# EAGLE board MPU-6050-HMC-5883 (EAGLE 6.2)
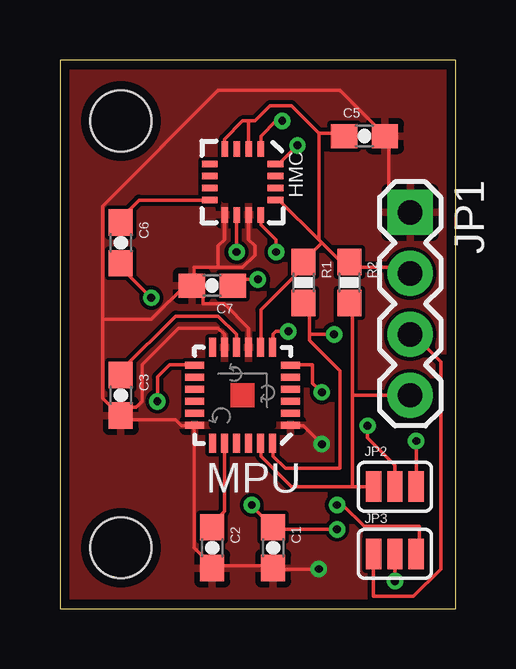
[diagram p0: board, top side]
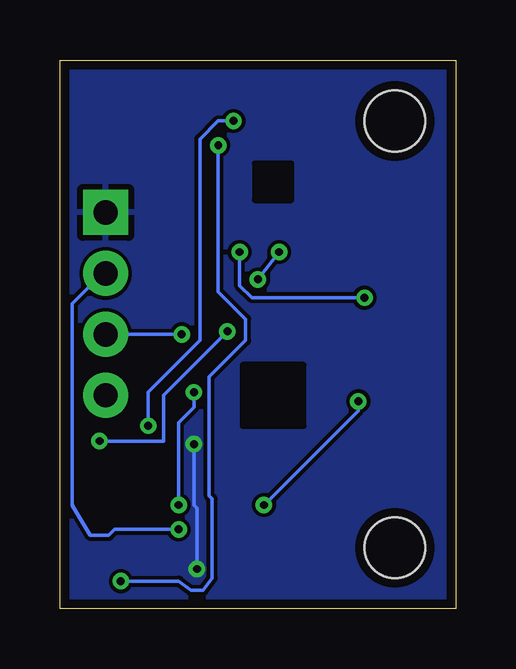
[diagram p1: board, bottom side, seen from below]

Size 16.51 x 22.86 mm. Coordinates in mm from the lower left corner, seen from the top.
Outline: 0,0 16.51,0 16.51,22.86 0,22.86 0,0
Copper layers (1*16): Top 0.0356mm / dielectric 1.5011mm / Bottom 0.0356mm
Design rules: minimum track width 6mil, minimum drill 13mil, track to track 6mil, track to pad 6mil, pad to pad 6mil, via to via 6mil, smd to smd 6mil, copper to edge 15mil, drill to drill 6mil, minimum pad ring 7mil, minimum via ring 7mil, stop-mask expansion 4mil, vias tented up to drill 0mil, thermal gap 10mil
Holes 2.54 mm at 2.54,20.32 2.54,2.54
tRestrict: area 6.9,17 to 8.4,18.5; area 6.3,7.6 to 8.9,10.2
bRestrict: area 6.9,17 to 8.4,18.5; area 6.3,7.6 to 8.9,10.2

## Footprints (pad centres in the part's own frame; a part is rotated, then mirrored left to right if it is on the bottom)
0603-CAP = smd 1.1 x 1: 1 -0.85,0; 2 0.85,0
16LPCC = smd 0.65 x 0.28: 1 -1.37,0.75; 2 -1.37,0.25; 3 -1.37,-0.25; 4 -1.37,-0.75; 9 1.37,-0.75; 10 1.37,-0.25; 11 1.37,0.25; 12 1.37,0.75 | smd 0.28 x 0.65: 5 -0.75,-1.37; 6 -0.25,-1.37; 7 0.25,-1.37; 8 0.75,-1.37; 13 0.75,1.37; 14 0.25,1.37; 15 -0.25,1.37; 16 -0.75,1.37
1X04 = drill 1.016 pad 1.88 square: 1 0,0 | drill 1.016 pad 1.88: 2 2.54,0; 3 5.08,0; 4 7.62,0
SJ_3 = smd 0.635 x 1.27: 1 -0.889,0; 2 0,0; 3 0.889,0
QFN-24 = smd 0.8 x 0.3: 1 -2,1.25; 2 -2,0.75; 3 -2,0.25; 4 -2,-0.25; 5 -2,-0.75; 6 -2,-1.25; 13 2,-1.25; 14 2,-0.75; 15 2,-0.25; 16 2,0.25; 17 2,0.75; 18 2,1.25 | smd 0.3 x 0.8: 7 -1.25,-2; 8 -0.75,-2; 9 -0.25,-2; 10 0.25,-2; 11 0.75,-2; 12 1.25,-2; 19 1.25,2; 20 0.75,2; 21 0.25,2; 22 -0.25,2; 23 -0.75,2; 24 -1.25,2
0603-RES = smd 1.1 x 1: 1 -0.85,0; 2 0.85,0

## Placement (x,y rotation side)
C1  [0603-CAP]  8.89,2.54 270 top
C2  [0603-CAP]  6.35,2.54 270 top
C3  [0603-CAP]  2.54,8.89 270 top
C5  [0603-CAP]  12.7,19.68 0 top
C6  [0603-CAP]  2.54,15.24 270 top
C7  [0603-CAP]  6.35,13.46 180 top
HMC  HMC5883LSMD  [16LPCC]  7.62,17.78 270 top
JP1  [1X04]  14.61,16.51 270 top
JP2  JUMPER-3SMD  [SJ_3]  13.97,5.08 0 top
JP3  JUMPER-3SMD  [SJ_3]  13.97,2.29 0 top
MPU  MPU-6050  [QFN-24]  7.62,8.89 180 top
R1  [0603-RES]  10.16,13.59 270 top
R2  [0603-RES]  12.06,13.59 270 top

## Library data of the parts
C1-C3 C5-C7 HMC JP1-JP3 R1 R2 = SparkFun
MPU = MPU-6050

## Nets
ACL: JP2.3 MPU.7
ADA: JP3.3 MPU.6
C1: C7.1 HMC.10
CPOUT: C2.1 MPU.20
GND: C1.2 C2.2 C3.2 C5.2 C7.2 HMC.9 HMC.11 JP1.1 MPU.1 MPU.9 MPU.11 MPU.18
REGOUT: C3.1 MPU.10
SCL: JP1.4 JP2.1 MPU.23 R2.2
SCLHMC: HMC.1 JP2.2
SDA: JP1.3 JP3.1 MPU.24 R1.2
SDAHMC: HMC.16 JP3.2
SETC: C6.2 HMC.12
SETP: C6.1 HMC.8
VCC: C1.1 C5.1 HMC.2 HMC.4 HMC.13 JP1.2 MPU.8 MPU.13 R1.1 R2.1

## Tracks (layer width: path | path; a pad name or v marks a point on that pad's centre or on a via)
ACL  (via drill 0.33)
  Top 0.152: v9.53,11.56 9.02,11.56 8.89,11.43 8.89,10.92 MPU.7 | JP2.3 v14.86,6.99
  Bottom 0.152: v14.86,6.99 12.19,6.99 12.19,8.89 v9.53,11.56
ADA  (via drill 0.33)
  Top 0.152: v10.92,9.02 10.54,9.4 10.54,10.16 9.4,10.16 MPU.6 | v11.56,4.32 11.81,4.32 12.7,3.43 14.99,3.43 14.99,2.54 JP3.3
  Bottom 0.152: v11.56,4.32 11.56,7.75 10.92,8.38 v10.92,9.02
C1  (via drill 0.33)
  Top 0.152: v7.37,14.86 7.37,16.51 HMC.10 | C7.1 7.49,13.72 v8.26,13.72
  Bottom 0.152: v8.26,13.72 v7.37,14.86
CPOUT
  Top 0.152: MPU.20 6.86,6.86 6.86,4.06 6.35,3.56 C2.1
GND  (via drill 0.33)
  Top 0.152: JP1.1 14.48,16.51 13.72,17.27 13.72,19.56 C5.2 13.46,19.81 11.68,21.59 6.6,21.59 1.78,16.76 1.78,12.06 | 6.6,14.22 6.6,15.11 6.86,15.37 6.86,16.26 HMC.9 | 5.59,13.97 5.59,14.22 6.6,14.22 | 6.6,14.22 7.62,14.22 8.13,14.73 8.13,15.11 7.87,15.37 7.87,16.26 HMC.11 | 7.87,11.68 7.87,10.92 MPU.9 7.87,11.68 | 5.59,13.97 5.97,13.59 | 5.59,13.97 C7.2 | 6.35,1.78 8.89,1.78 C1.2 8.93,1.65 v10.79,1.65 | 5.84,7.62 MPU.18 5.59,7.62 | MPU.1 9.4,7.62 10.16,7.62 v10.92,6.86 | 5.59,7.62 5.08,7.62 4.83,7.87 2.54,7.87 C3.2 2.92,8.38 | 6.35,1.78 5.59,2.54 5.59,7.62 | 6.35,1.78 C2.2 | 2.92,8.38 3.17,8.38 3.43,8.64 3.43,10.16 4.95,11.68 6.6,11.68 6.86,11.43 6.86,10.92 MPU.11 | 1.78,12.06 1.78,8.76 2.16,8.38 2.92,8.38 | 7.87,11.68 6.86,12.7 5.97,12.7 5.97,13.59 | 5.97,13.59 5.33,13.59 3.81,12.06 1.78,12.06
  Bottom 0.152: v10.92,6.86 10.92,4.32 10.79,4.19 v10.79,1.65
  pour Top: 0,22.86 16.51,22.86 16.51,0 0,0
  pour Bottom: 0,22.86 16.51,22.86 16.51,0 0,0
REGOUT
  Top 0.152: MPU.10 7.37,10.92 7.37,11.43 6.6,12.19 4.83,12.19 2.54,9.91 C3.1
SCL
  Top 0.152: JP2.1 12.19,5.08 | 12.19,5.08 9.65,5.08 8.38,6.35 8.38,6.86 MPU.23 | 12.19,5.08 12.19,8.89 | 12.19,8.89 12.19,12.7 R2.2 | 12.19,8.89 JP1.4
SCLHMC  (via drill 0.33)
  Top 0.152: v9.27,20.32 9.02,20.32 8.38,19.68 8.38,19.05 HMC.1 | v12.83,7.62 12.83,7.11 13.97,5.97 JP2.2
  Bottom 0.152: v9.27,20.32 9.91,20.32 10.67,19.56 10.67,11.18 12.83,9.02 v12.83,7.62
SDA  (via drill 0.33)
  Top 0.152: 10.41,11.43 10.41,12.45 10.16,12.7 R1.2 | 10.41,11.43 10.41,11.18 11.68,9.91 11.68,5.84 9.4,5.84 8.89,6.35 8.89,6.86 MPU.24 | JP3.1 13.08,0.51 14.73,0.51 15.88,1.65 15.88,10.29 14.73,11.43 JP1.3 | v11.43,11.43 10.41,11.43
  Bottom 0.152: JP1.3 v11.43,11.43
SDAHMC  (via drill 0.33)
  Top 0.152: v9.91,19.3 9.14,18.54 HMC.16 | JP3.2 v13.97,1.14
  Bottom 0.152: v9.91,19.3 9.91,13.21 8.76,12.06 8.76,11.18 10.29,9.65 10.29,4.7 10.16,4.57 10.16,1.27 10.54,0.76 11.05,0.76 11.56,1.14 v13.97,1.14
SETC  (via drill 0.33)
  Top 0.152: v9.02,14.86 9.02,15.37 8.38,16 8.38,16.26 HMC.12 | v3.81,12.95 2.54,14.22 C6.2
  Bottom 0.152: v9.02,14.86 9.02,13.46 8.51,12.95 v3.81,12.95
SETP
  Top 0.152: HMC.8 6.1,17.02 3.3,17.02 2.54,16.26 C6.1
VCC  (via drill 0.33)
  Top 0.152: 10.79,19.81 11.68,19.81 C5.1 | 10.79,19.81 9.65,20.95 8.76,20.95 8.13,20.32 7.87,20.32 | 7.87,20.32 7.62,20.32 6.86,19.56 6.86,19.3 HMC.4 | 7.87,20.32 7.87,19.3 HMC.2 | MPU.13 5.84,10.16 4.57,10.16 4.06,9.65 v4.06,8.64 | 8.38,10.67 MPU.8 8.38,10.92 8.38,12.45 10.16,14.22 R1.1 10.16,14.48 10.92,15.24 | 10.92,15.24 11.94,14.22 R2.1 12.19,14.22 14.22,14.22 14.48,13.97 JP1.2 | 10.92,15.24 10.79,15.37 | 10.79,15.37 9.14,17.02 HMC.13 | 10.79,15.37 10.79,19.81 | v11.56,3.3 8.89,3.3 C1.1 7.96,4.32 v8,4.32
  Bottom 0.152: v11.56,3.3 14.22,3.3 14.48,3.05 15.24,3.05 16,4.32 16,12.7 14.73,13.97 JP1.2 | v4.06,8.64 4.06,8.26 v8,4.32